# Altium PCB ESP32 PCB V1.PcbDoc (part 4 of 4)
Units mil, origin at the board's own origin, x right, y up, seen from the top; angles counter-clockwise.
Board outline 2700 x 1000 mil, 4 copper layers (L1, L2, L3, L4), stack 61.581 mil thick; 64 components, 73 nets, 299 pads, 162 vias.
Unrouted connection lines stored in the file: 1.
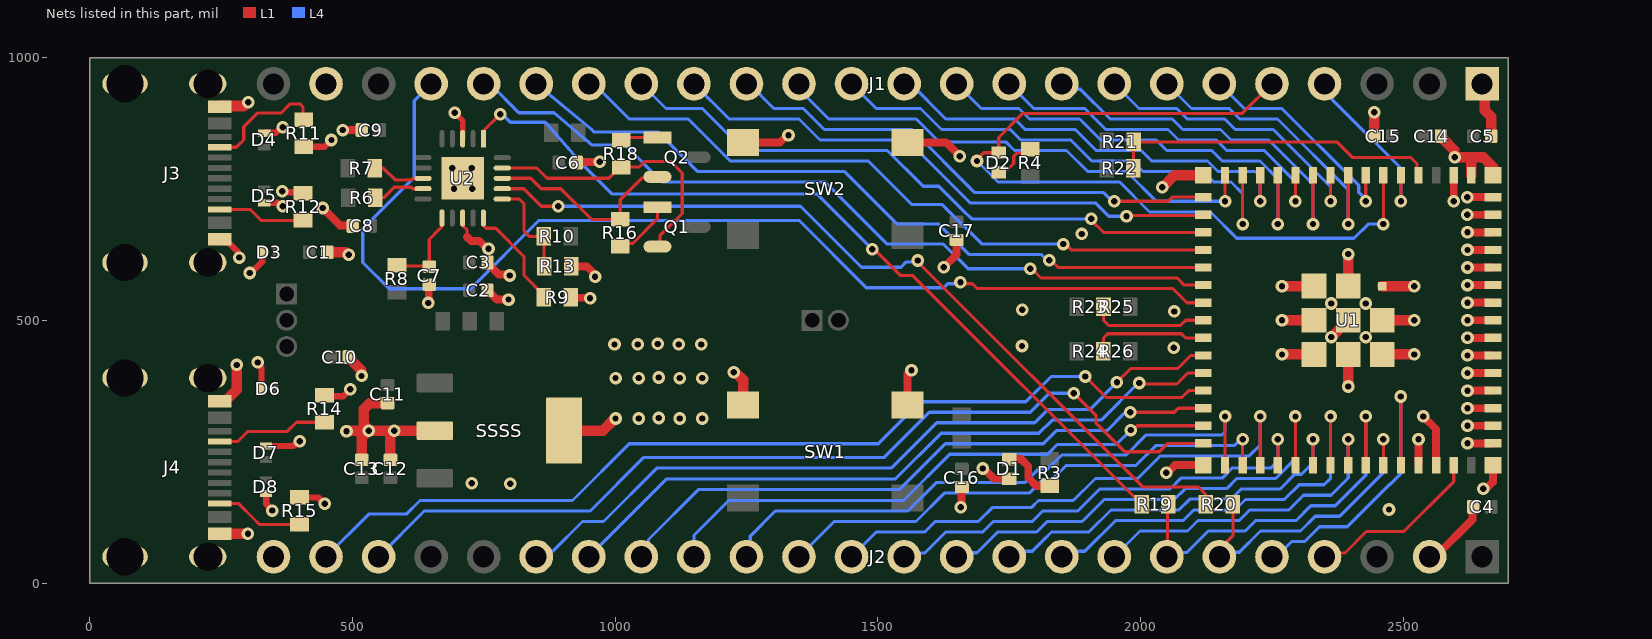
[diagram p4: the nets of this part, all layers, seen from the top]

## Via types
v1: diameter 24, hole 12, L1 to L4, tented both sides, 162 vias

## Nets (pads, with @x,y where several pads share a name; then routed paths per layer and width w, separated by ;. In a path a pad name is that pad's centre, name@x,y a point inside that pad or via, vN(x,y) a via of type N, cw(c..) or ccw(c..) an arc to the next point about the centre after c; other vN are vias at no path point) (continued)
DTR_FTDI: Q2.2 R16.1 U2.18 | length 371.4
  L1 w6: U2.18@796.94,770.23 809.27,770.23 839.77,770.23 859.69,750.31 896.87,750.32 955.14,692.04 R16.1@1010,692.04 1010,729.5 1050.94,770.44 1078.18,770.44 Q2.2@1080.58,772.83
ESP_USB_N: R23.2 R25.2 U1.23 | length 223.8
  L1 w6.03: R23.2@1929.66,525.64 1929.66,499.51 1938.89,490.28 2075.93,490.28 2085.65,500 U1.23@2119.45,500
ESP_USB_P: R24.2 R26.2 U1.24 | length 222
  L1 w6.03: R24.2@1929.4,440.94 1929.4,466.28 1937.53,474.41 2077.57,474.41 2085.44,466.54 U1.24@2119.45,466.54
FTDI_RESET: C7.1 R8.2 U2.11 | length 164.7
  L1 w6: R8.2@585,604.33 586.06,603.27 645.28,603.27 C7.1@646.34,602.2 646.34,653.77 664.46,671.89 669.95,677.38 669.95,693.91 U2.11@670.63,694.59
FTDI_USB_N: R6.2 U2.9 | length 100.6
  L1 w6.03: R6.2@543.34,733.44 560.13,733.44 579.84,753.14 612.21,753.14 615.04,750.32 U2.9@634.59,750.32
FTDI_USB_P: R7.2 U2.8 | length 102.5
  L1 w6.03: R7.2@542.43,789.34 559.23,789.34 581.4,767.17 612.21,767.17 615.04,770 U2.8@634.59,770
GND: C1.1 C2.1 C3.2 C4.1 C5.1 C6.2 C7.2 C8.2 C9.1 C10.1 C11.1 C12.1 C13.1 C14.1 C15.1 C16.1 C17.1 D1.1 D3.1 D4.1 D5.1 D6.1 D7.1 D8.1 J1.1 J1.23 J2.2 J2.24 J3.A1B12 J3.B1A12 J3.S1 J3.S2 J3.S3 J3.S4 J4.A1B12 J4.B1A12 J4.S1 J4.S2 J4.S3 J4.S4 R9.2 R11.1 R12.1 R13.1 R14.1 R15.1 SSSS.2 SSSS.4 SW1.3 SW1.4 SW2.3 SW2.4 U1.1 U1.2 U1.42 U1.43 U1.46 U1.47 U1.48 U1.49 U1.50 U1.51 U1.52 U1.53 U1.54 U1.55 U1.56 U1.57 U1.58 U1.59 U1.60 U1.61 U1.62 U1.63 U1.64 U1.65 U1.66 U1.67 U1.68 U1.69 U1.70 U1.71 U1.72 U1.73 U2.3 U2.13 U2.21 | length 4536.4
  L1 w6: U2.13@710,694.59 710,680.21 718.32,671.89 718.32,658.61
  L1 w10.01: v1(695.09,895) 710,880.09 U2.3@710,845.41
  L1 w12: J3.B1A12@247.64,653.94 253.45,648.13 264.28,648.13 282.38,630.03 282.38,621.59 v1(284.67,619.29) ; v1(305,590) 307.13,590 328.52,611.39 328.52,628.64 D3.1@329.41,629.53 ; v1(320.31,419.76) 320.31,416.52 327.2,409.63 D6.1@327.2,370 ; D5.1@332.5,723.82 357.49,723.82 364.18,717.13 v1(367.43,717.13) ; D4.1@332.61,855.89 333.5,856.78 354.07,856.78 364.61,867.32 v1(367.86,867.32) ; D8.1@335.75,170.48 335.75,169.96 336.12,169.59 336.12,150.47 347.56,139.03 v1(347.56,137.9) ; D7.1@335.77,260.82 388.06,260.82 396.75,269.51 v1(400,269.51) ; v1(366.76,745.63) 369.03,743.35 404.16,743.35 R12.1@406.2,741.31 ; R15.1@399.56,162.77 434.89,162.77 446.85,150.8 v1(447.46,150.8) ; R11.1@407.57,830.3 447.25,830.3 460.04,843.1 v1(460.28,843.1) ; R14.1@442.61,355.59 482.63,355.59 v1(495.98,368.94)
  L1 w15: v1(443.64,713.66) 476.83,680.47 498.63,680.47 C8.2@499.65,679.45 ; v1(482,861.94) C9.1@509.25,861.94 ; v1(644.41,533) 645.37,533.97 645.37,566.83 C7.2@646.34,567.8 ; 718.32,658.61 725.79,651.15 741.51,651.15 756.64,636.02 v1(759.08,636.02) ; C3.2@757.2,610 761.52,605.69 761.52,604.31 778.93,586.9 798.01,586.9 v1(799.73,585.18) ; C2.1@757.26,557.04 757.26,555.66 761.58,551.35 762.95,551.35 774.93,539.37 v1(797.17,539.37) ; R9.2@915.59,543.85 916.69,542.75 951.38,542.75 v1(952.48,541.65) ; R13.1@916.37,602.7 R13.1@916.37,602.7 946.32,602.66 960.29,588.7 960.29,584.71 v1(962.01,582.99) ; C6.2@927.2,800 928.07,800.87 970.07,800.87 v1(970.94,801.74) ; SW2.4@1243.5,838.58 1314.15,838.58 1327.56,852 v1(1330,852) ; SW1.3@1556.5,338.58 1556.5,397.5 v1(1564,405) ; SW2.3@1556.5,838.58 1629.89,838.58 v1(1656.1,812.37) ; v1(1625.65,600.84) 1650,625.19 C17.1@1650,652.8 ; v1(1657.73,144) 1658.87,145.13 1658.87,181.66 C16.1@1660,182.8 ; v1(1699.72,218) 1701.64,218 1721.14,198.5 D1.1@1750,198.5 ; v1(2048.77,209.89) 2051.2,209.89 2065.72,224.41 U1.64@2119.45,224.41 ; U1.42@2528.9,224.41 2528.9,276.06 v1@2530.62,277.78 ; v1(2538,317) 2538,316.93 2562.36,292.57 U1.43@2562.36,224.41 ; J2.2@2550,50 2560.62,50 2631.66,121.04 2631.66,139.31 2632.8,140.45 C4.1@2632.8,145 ; v1(2595.83,726.38) U1.2@2595.83,775.59 ; v1(2621.42,700.79) U1.59@2670.63,700.79 ; v1(2621.42,734.25) U1.60@2670.63,734.25 ; v1(2622,265.75) U1.46@2670.63,265.75 ; v1(2622,299.21) U1.47@2670.63,299.21 ; v1(2622,332.68) U1.48@2670.63,332.68 ; v1(2622,366.14) U1.49@2670.63,366.14 ; v1(2622,399.61) U1.50@2670.63,399.61 ; v1(2622,433.07) U1.51@2670.63,433.07 ; v1(2622,466.54) U1.52@2670.63,466.54 ; v1(2622,500) U1.53@2670.63,500 ; v1(2622,533.46) U1.54@2670.63,533.46 ; v1(2622,566.93) U1.55@2670.63,566.93 ; v1(2622,600.39) U1.56@2670.63,600.39 ; v1(2622,633.86) U1.57@2670.63,633.86 ; v1(2622,667.32) U1.58@2670.63,667.32 ; v1(2652.08,179.39) 2653.81,181.11 2659.09,181.11 2670.31,192.33 2670.31,224.09 U1.65@2670.63,224.41
  L1 w20: J3.S1@225,950 227.37,950 J3.S1@236.32,941.05 ; J4.B1A12@247.64,94.09 259.96,94.09 260.28,93.78 v1(301.41,93.78) ; J4.A1B12@247.64,346.06 258.46,346.06 280,367.6 v1@280,413.92 ; J3.A1B12@247.64,905.91 249.45,907.72 293.63,907.72 300.92,915 v1(302,915) ; C1.1@452.42,629.53 487,629.53 491.92,624.61 v1(493,624.61) ; v1(489,289) 489.5,289.5 530.69,289.5 v1(531.19,290) ; C10.1@493.43,430 493.43,428.62 516.92,405.13 516.92,394.85 v1(517.69,394.09) ; C13.1@518,234.37 518,276.18 531.19,289.37 v1(531.19,290) ; C11.1@567.28,342.37 533.15,342.37 521.44,330.65 521.44,300.83 531.19,291.08 v1(531.19,290) ; C12.1@572.63,234.37 572.63,281.94 579.61,288.92 v1(579.61,290) SSSS.2@656.97,290 ; v1@572.63,290 v1(531.19,290) ; SSSS.4@905,280 905,288.03 SSSS.4@903.03,290 976.92,290 999.92,313 v1(1001,313) ; v1(1226,401) 1226.77,400.23 1229.68,400.23 1243.5,386.41 SW1.4@1243.5,338.58 ; v1(2041,753.38) 2042.08,753.38 2064.29,775.59 U1.63@2119.45,775.59 ; v1(2269.06,435.04) U1.73@2330.08,435.04 ; v1(2269.06,500) U1.72@2330.08,500 ; v1(2269.06,564.96) U1.71@2330.08,564.96 ; v1(2363,468) U1.61@2395.04,500 ; v1(2395.04,374.02) U1.70@2395.04,435.04 ; U1.69@2395.04,564.96 v1(2395.04,625.98) ; C15.1@2444.76,850.24 v1(2444.76,896) ; U1.68@2460,435.04 v1(2521.02,435.04) ; U1.67@2460,500 v1(2521.02,500) ; U1.66@2460,564.96 v1(2521.02,564.96) ; C14.1@2571.69,850.24 2573.5,848.43 2573.5,847.05 2597.23,823.32 2597.23,810.32 2596.92,810 2624.98,810 ; U1.1@2629.29,775.59 2629.29,805.69 2624.98,810 ; J1.1@2650,950 2655.1,944.9 2655.1,899.72 2667.2,887.61 C5.1@2667.2,850.24 ; U1.62@2670.63,775.59 2670.63,791.34 2651.97,810 2624.98,810
  other v1: 2472.63,140 800.7,189.03 727.37,190 2528.9,273.62 1045,313 1123,313 1166,312.99 1083,314 1001,389.99 1045,390 1123,390 1166,389.99 1083,391 280,415 2063.29,447.85 1774.27,451 999,453.99 1043,454 1121,454 1164,453.99 1081,455 2428.5,468 2064.08,516.84 1775.07,520 2363,532 2428.5,532 1888.31,664.27 693.69,750.32 727.96,750.32 690.31,789.76 727.37,789.76 2598,810
GPIO0: R21.2 R22.2 U1.4 | length 630.2
  L1 w6: R22.2@1986.41,789.06 1986.67,789.32 1986.67,839.1 R21.2@1986.94,839.37 2373.54,839.37 2402.91,810 2513.69,810 2526.08,797.61 2526.08,778.41 U1.4@2528.9,775.59
GPIO1: J1.4 U1.5 | length 333.1
  L1 w6: v1(2495.43,726.38) U1.5@2495.43,775.59
  L4 w6: J1.4@2350,950 2350,935.39 2365.48,919.91 2365.48,919.01 2495.43,789.06 v1(2495.43,726.38)
GPIO2: D2.1 J1.5 U1.6 | length 1578.9
  L1 w6: v1(1688.78,802.98) 1688.78,806.26 1701.22,818.7 D2.1@1730,818.7 1730,847.72 1775.98,893.69 2193.69,893.69 J1.5@2250,950 ; v1(2461.97,683) U1.6@2461.97,775.59
  L4 w6: v1(1688.78,802.98) 1728.76,763 1960.01,763 2016.94,706.07 2133,706.07 2183.07,656 2406.22,656 2433.22,683 v1(2461.97,683)
GPIO3: J1.6 U1.7 | length 430.2
  L1 w6: v1(2428.5,726.38) U1.7@2428.5,775.59
  L4 w6: J1.6@2150,950 2197,903 2268.72,903 2415.04,756.68 2415.04,743.63 2428.5,730.17 v1(2428.5,726.38)
GPIO4: J1.7 U1.8 | length 586.5
  L1 w6: v1(2395.04,683) U1.8@2395.04,775.59
  L4 w6: J1.7@2050,950 2097,903 2168.72,903 2188.72,883 2260.43,883 2395.04,748.39 v1(2395.04,683)
GPIO5: J1.8 U1.9 | length 569.3
  L1 w6: v1(2361.57,726.38) U1.9@2361.57,775.59
  L4 w6: J1.8@1950,950 1997,903 2068.72,903 2088.72,883 2160.43,883 2180.43,863 2252.15,863 2361.57,753.57 v1(2361.57,726.38)
GPIO6: J1.9 U1.10 | length 725.7
  L1 w6: v1(2328.11,683) U1.10@2328.11,775.59
  L4 w6: J1.9@1850,950 1860.33,939.67 1885.51,939.67 1942.17,883 2060.43,883 2080.43,863 2152.15,863 2172.15,843 2243.86,843 2328.11,758.75 v1(2328.11,683)
GPIO7: J1.10 U1.11 | length 708.5
  L1 w6: v1(2294.65,726.38) U1.11@2294.65,775.59
  L4 w6: J1.10@1750,950 1797,903 1868.72,903 1893.89,903 1933.89,863 2052.15,863 2072.15,843 2143.86,843 2163.86,823 2235.58,823 2294.65,763.93 v1(2294.65,726.38)
GPIO8: J1.11 U1.12 | length 864.8
  L1 w6: v1(2261.18,683) U1.12@2261.18,775.59
  L4 w6: J1.11@1650,950 1697,903 1768.72,903 1788.72,883 1860.43,883 1884,883 1924,843 2030,843 2050,823 2135.58,823 2155.58,803 2227.29,803 2261.18,769.11 v1(2261.18,683)
GPIO9: J1.12 U1.13 | length 847
  L1 w6: v1(2227.72,726.38) U1.13@2227.72,775.59
  L4 w6: J1.12@1550,950 1562.47,950 1629.47,883 1760.43,883 1780.43,863 1852.15,863 1875.72,863 1915.72,823 2001.07,823 2021.07,803 2127.29,803 2147.29,783 2218,783 2227.72,773.28 v1(2227.72,726.38)
GPIO10: J1.13 U1.14 | length 981.4
  L1 w6: v1(2194.25,683) U1.14@2194.25,775.59
  L4 w6: J1.13@1450,950 1497,903 1581.18,903 1621.18,863 1752.15,863 1772.15,843 1867.43,843 1907.43,803 1984.51,803 2004.51,783 2119.01,783 2139.01,763 2172.15,763 2194.25,740.9 v1(2194.25,683)
GPIO11: J1.14 U1.15 | length 958.7
  L1 w6: v1(2160.79,726.38) U1.15@2160.79,775.59
  L4 w6: J1.14@1350,950 1350,939.57 1406.57,883 1572.9,883 1616.53,839.37 1743.63,839.37 1760,823 1859.15,823 1899.15,783 1973.19,783 2029.82,726.38 v1(2160.79,726.38)
GPIO12: J1.15 U1.16 | length 965.3
  L1 w6: v1(1950,726.38) 2052.18,726.38 2060.06,734.25 U1.16@2119.45,734.25
  L4 w6: J1.15@1250,950 1255.28,950 1302.28,903 1358.28,903 1398.28,863 1564.62,863 1684.62,743 1929.59,743 1946.21,726.38 v1(1950,726.38)
GPIO13: J1.16 U1.17 | length 1074.9
  L1 w6: v1(1973.19,698.07) 1974.55,699.43 2118.09,699.43 U1.17@2119.45,700.79
  L4 w6: J1.16@1150,950 1217,883 1350,883 1390,843 1556.33,843 1676.33,723 1914.74,723 1939.66,698.07 v1(1973.19,698.07)
GPIO14: J1.17 U1.18 | length 1188.6
  L1 w6: v1(1906.17,693.38) 1906.17,690.56 1929.41,667.32 U1.18@2119.45,667.32
  L4 w6: J1.17@1050,950 1097,903 1165.95,903 1245.95,823 1518,823 1586.09,754.91 1616.14,754.91 1668.05,703 1668.85,703 1678.93,692.91 1905.7,692.91 v1(1906.17,693.38)
GPIO15: J1.18 U1.19 | length 1300.4
  L1 w6: v1(1853,645) 1856.79,645 1867.93,633.86 U1.19@2119.45,633.86
  L4 w6: J1.18@950,950 959.82,950 1026.82,883 1139.09,883 1219.11,802.98 1482,802.98 1564.98,720 1622.76,720 1659.76,683 1660.56,683 1698.56,645 v1(1853,645)
GPIO16: J1.19 U1.20 | length 1409.5
  L1 w6: v1(1826.09,614.09) 1829.88,614.09 1843.58,600.39 U1.20@2119.45,600.39
  L4 w6: J1.19@850,950 955.86,862.61 956.57,861.96 960.53,858 1082.54,858 1157.63,782.91 1436.8,782.91 1536.71,683 1616.14,683 1674.14,625 1811.4,625 1822.3,614.09 v1(1826.09,614.09)
GPIO17: J1.20 U1.21 | length 1525.1
  L1 w6: v1(1790,598) 1792.97,598 1810.58,580.39 2069.79,580.39 2083.25,566.93 U1.21@2119.45,566.93
  L4 w6: J1.20@750,950 761.96,950 816.96,895 883.6,895 956.71,833.2 1019.78,833.2 1090.07,762.91 1400,762.91 1517.91,645 1625,645 1672,598 v1(1790,598)
GPIO18: J1.21 U1.22 | length 2141.1
  L1 w6: v1(1657.2,572.2) 1659.88,569.52 1680.07,569.52 1689.2,560.39 2061.5,560.39 2088.43,533.46 U1.22@2119.45,533.46
  L4 w6: J1.21@650,950 618,918 618,870 618,771.81 520,673.81 520,610 570,560 725.35,560 855.35,690 1350,690 1478,562 1625.2,562 1632.72,569.52 1654.52,569.52 v1(1657.2,572.2)
GPIO21: J2.19 U1.25 | length 1428.1
  L1 w6: v1(1955,382) 1981.23,408.23 2070.44,408.23 2094.95,432.73 2119.11,432.73 U1.25@2119.45,433.07
  L4 w6: J2.19@850,50 860.33,60.33 881.33,60.33 938,117 978,117 1080.14,219.14 1526.23,219.14 1612.1,305 1798.27,305 1823.31,330.03 1903.03,330.03 v1(1955,382)
GPIO26: J2.18 U1.26 | length 1315.8
  L1 w6: v1(1997.61,380.55) 1999.42,378.75 2069.24,378.75 2074.16,383.66 2090.11,399.61 U1.26@2119.45,399.61
  L4 w6: J2.18@950,50 1098.14,198.14 1533.52,198.14 1620.38,285 1806.56,285 1831.59,310.03 1925.03,310.03 1995.55,380.55 v1(1997.61,380.55)
GPIO33: J2.17 U1.28 | length 1197.7
  L1 w6: v1(1980.35,325) 2064.18,325 2071.86,332.68 U1.28@2119.45,332.68
  L4 w6: J2.17@1050,50 1050,64.61 1063.73,78.35 1063.73,82.73 1159.14,178.14 1541.81,178.14 1628.67,265 1814.84,265 1839.88,290.03 1936.02,290.03 1968.31,322.32 1977.67,322.32 v1(1980.35,325)
GPIO34: J2.16 U1.29 | length 1096.7
  L1 w6: v1(1981.33,291.02) 1985.12,291.02 1993.32,299.21 U1.29@2119.45,299.21
  L4 w6: J2.16@1150,50 1150.14,50.14 1150.14,91.14 1216,157 1548.95,157 1636.95,245 1823.12,245 1841.66,263.54 1953.52,263.54 1981,291.02 v1(1981.33,291.02)
GPIO35: J2.15 U1.31 | length 1149.8
  L1 w6: U1.31@2160.79,224.41 v1(2160.79,317)
  L4 w6: J2.15@1250,50 1257.23,57.23 1257.23,89.23 1305,137 1557.23,137 1611.23,191 1779.72,191 1805.98,217.27 1823.68,217.27 1849.94,243.54 1972.63,243.54 2011.09,282 2154.93,282 2160.79,287.86 v1(2160.79,317)
GPIO36: J2.14 U1.32 | length 986.1
  L1 w6: U1.32@2194.25,224.41 v1(2194.25,273.62)
  L4 w6: J2.14@1350,50 1417,117 1572.63,117 1626.63,171 1788,171 1814.27,197.27 1831.96,197.27 1858.23,223.54 1991.09,223.54 2029.56,262 2178.84,262 2190.46,273.62 v1(2194.25,273.62)
GPIO37: J2.13 U1.33 | length 1012.7
  L1 w6: U1.33@2227.72,224.41 v1(2227.72,317)
  L4 w6: J2.13@1450,50 1497,97 1589.23,97 1609.23,117 1691.43,117 1718.43,144 1792.68,144 1805.68,157 1872.15,157 1914.15,199 1994.84,199 2037.84,242 2207,242 2227.72,262.72 v1(2227.72,317)
GPIO38: J2.12 U1.34 | length 877.7
  L1 w6: U1.34@2261.18,224.41 v1(2261.18,273.62)
  L4 w6: J2.12@1550,50 1557.23,57.23 1589.23,57.23 1629,97 1699.72,97 1719.72,117 1793.96,117 1813.96,137 1880.43,137 1922.43,179 2056.06,179 2076.73,199.67 2155.39,199.67 2174.71,219 2248.61,219 2261.18,231.57 v1(2261.18,273.62)
GPIO39: J2.11 U1.35 | length 894.8
  L1 w6: U1.35@2294.65,224.41 v1(2294.65,317)
  L4 w6: J2.11@1650,50 1657.73,57.73 1688.73,57.73 1728,97 1802.25,97 1822.25,117 1888.72,117 1930.72,159 2064.34,159 2085.02,179.67 2163.67,179.67 2183,199 2256.89,199 2294.65,236.75 v1(2294.65,317)
GPIO40: J2.10 U1.36 | length 746.2
  L1 w6: U1.36@2328.11,224.41 v1(2328.11,273.62)
  L4 w6: J2.10@1750,50 1760.33,60.33 1793.86,60.33 1816.77,83.23 1830.53,97 1850,97 1901.72,97 1943.72,139 2072.63,139 2093.3,159.67 2171.96,159.67 2191.28,179 2265.43,179 2293.43,207 2306.25,207 2328.11,228.86 v1(2328.11,273.62)
GPIO41: J2.9 U1.37 | length 783.5
  L1 w6: U1.37@2361.57,224.41 v1(2361.57,317)
  L4 w6: J2.9@1850,50 1860.33,60.33 1893.86,60.33 1952.53,119 2080.91,119 2100.91,139 2179.57,139 2199.57,159 2273.72,159 2301.72,187 2349,187 2361.57,199.57 v1(2361.57,317)
GPIO42: J2.8 U1.38 | length 630.1
  L1 w6: U1.38@2395.04,224.41 v1(2395.04,273.62)
  L4 w6: J2.8@1950,50 1999,99 2089.2,99 2109.2,119 2187.85,119 2207.85,139 2282,139 2310,167 2362.26,167 2395.04,199.78 v1(2395.04,273.62)
GPIO45: J2.5 U1.41 | length 588.2
  L1 w6: v1(2495,355) 2495.22,354.78 2495.22,224.63 U1.41@2495.43,224.41
  L4 w6: J2.5@2250,50 2258.47,50 2287.47,79 2312.53,79 2340.53,107 2392.97,107 2473.97,188 2475,188 2495,208 v1(2495,355)
GPIO46: J2.4 U1.44 | length 336.5
  L1 w6: J2.4@2350,50 2357.23,57.23 2388.96,57.23 2429.73,98 2500.91,98 2595.83,192.92 U1.44@2595.83,224.41
GPIO47: J2.23 U1.27 | length 1833.4
  L1 w6: v1(1895,393) 1934.89,353.11 2078.54,353.11 2091.57,366.14 U1.27@2119.45,366.14
  L4 w6: J2.23@450,50 531.07,131.07 602.79,131.07 628.72,157 919,157 1027,265 1500.71,265 1580.71,345 1781.7,345 1829.7,393 v1(1895,393)
GPIO48: J2.22 U1.30 | length 1759.3
  L1 w6: v1(1872.63,361.02) 1915.39,318.25 1915.39,304.1 1969.81,249.69 2035.86,249.69 2051.92,265.75 U1.30@2119.45,265.75
  L4 w6: J2.22@550,50 637,137 952.63,137 1054.77,239.14 1512.23,239.14 1598.1,325 1789.99,325 1826,361.02 v1(1872.63,361.02)
NetD1_2: D1.2 R3.1 | length 111.4
  L1 w15: D1.2@1750,235.91 1772.63,235.91 1786.31,222.22 1786.31,200.38 1801.97,184.72 R3.1@1827.37,184.72
NetD2_2: D2.2 R4.1 | length 86.5
  L1 w6: D2.2@1730,781.3 1736.81,788.11 1748.58,788.11 1758.78,798.31 1758.78,812.24 1764.64,818.09 1782.5,818.09 R4.1@1790,825.59
NetJ3_A5: J3.A5 R11.2 | length 234.8
  L1 w6: J3.A5@247.64,829.13 279.35,829.13 285,834.78 293.31,843.1 293.31,868.13 319.28,894.09 364.35,894.09 382,911.74 400.34,911.74 406.2,905.89 406.2,882.86 R11.2@407.57,881.49
NetJ3_B5: J3.B5 R12.2 | length 167.2
  L1 w6: J3.B5@247.64,711.02 285,711.02 305.38,711.02 326.27,690.13 R12.2@406.2,690.13
NetJ4_A5: J4.A5 R14.2 | length 214.7
  L1 w6: J4.A5@247.64,269.29 282.14,269.29 301.41,288.57 376.53,288.57 393.79,305.83 R14.2@447.21,305.83
NetJ4_B5: J4.B5 R15.2 | length 150.1
  L1 w6: J4.B5@264.28,151.09 282.14,151.09 ; 283.7,151.09 313.01,121.78 323.2,111.59 R15.2@399.56,111.59
NetQ1_1: Q1.1 R16.2 | length 102.9
  L1 w6: R16.2@1010,640.86 1014.93,645.79 1033.2,645.79 1080.58,693.17 1080.58,703.86
NetQ2_1: Q2.1 R18.2 | length 71
  L1 w6: R18.2@1011.54,842.81 1016.37,847.64 Q2.1@1080.58,847.64
NetR9_1: R9.1 U2.15 | length 208.6
  L1 w6: U2.15@749.37,694.59 749.37,680.86 755.23,675 772.66,675 826.73,620.93 826.73,585.47 864.41,547.79 R9.1@864.41,543.85
RTS_FTDI: Q1.2 R18.1 U2.19 | length 536
  L1 w6: U2.19@785.68,789.41 809.27,789.41 851.39,789.41 870.49,770.32 988.19,770.32 R18.1@1013.78,795.91 ; R18.1@1011.54,791.63 1046.15,791.63 1056.8,802.27 1105.91,802.27 1127.86,780.32 1127.86,703.22 1085.37,660.72 1085.37,645.11 Q1.2@1080.58,640.32
RXD_FTDI: R19.2 U2.1 | length 1593
  L1 w6: U2.1@749.37,845.41 749.37,859.99 751.33,861.94 v1(781.58,892.2) ; v1(1489.49,635.16) 1493.28,635.16 1543.44,585 1566.78,585 1989.07,162.72 1993,162.72 2001.78,153.94 R19.2@2001.78,150
  L4 w6: v1(781.58,892.2) 785.37,892.2 800.74,876.83 866.94,876.83 868.7,875.07 868.84,874.93 868.96,874.79 935.28,799.21 935.42,799.07 994.49,740 1384.65,740 1469.69,654.96 v1(1489.49,635.16)
TXD_FTDI: R20.2 U2.17 | length 1610.3
  L1 w6: U2.17@785.41,750.32 809.27,750.32 826.16,750.32 859.47,717 v1(892,717) ; v1(1576.14,613.83) 1576.14,610.95 2004.2,182.89 2109.23,182.89 2124.41,167.72 R20.2@2124.41,150
  L4 w6: v1(892,717) 1352.91,717 1468.91,601 1544.14,601 1554.29,611.15 1573.46,611.15 v1(1576.14,613.83)
U0RXD: J2.6 R20.1 U1.40 | length 601.6
  L1 w6: J2.6@2150,50 2150,64.61 2175.59,90.2 R20.1@2175.59,150 ; U1.40@2461.97,224.41 v1(2461.97,273.62)
  L4 w6: J2.6@2150,50 2158.62,58.62 2187.85,58.62 2228.23,99 2304.25,99 2332.25,127 2378.83,127 2461.97,210.14 v1(2461.97,273.62)
U0TXD: J2.7 R19.1 U1.39 | length 748.5
  L1 w6: J2.7@2050,50 2051.48,51.48 2051.48,148.52 R19.1@2052.96,150 ; U1.39@2428.5,224.41 v1(2428.5,317)
  L4 w6: J2.7@2050,50 2058.23,58.23 2088.23,58.23 2129,99 2199,99 2219,119 2295.96,119 2323.96,147 2370.54,147 2428.5,204.96 v1(2428.5,317)
VBUS_SENSE: R10.1 R13.2 U2.16 | length 196.5
  L1 w6: U2.16@785.41,730.63 809.27,730.63 818.13,730.63 826.73,722.03 826.73,669.74 836.85,659.61 864.8,659.61 864.8,603.09 R13.2@865.18,602.7
pads on no net: J1.24 J3.A8 J3.B8 J4.A8 J4.B8 U2.2 U2.4 U2.5 U2.6 U2.7 U2.14

## Polygon pours and split planes (outlines as drawn)
+3.3V on L1 "+3.3V_L01_P000" (solid, pour order 0): 2467.15,875.78 2467.15,834.73 2467.03,834.61 2467.15,834.49 2549.82,834.49 2549.82,893.18 2533,910 2490.12,910
+3V3_FTDI on L1 "+3V3_FTDI_L01_P004" (solid, pour order 4): 896.5,877.71 897.84,876.37 897.84,847.07 902.9,842.02 902.9,815.25 907.07,811.08 907.07,785.8 882.82,785.8 877.62,791 873.35,791.06 868.8,791 847.09,812.72 834.04,812.72 831.81,814.95 831.66,814.8 811.44,814.8 811.44,854.78 834.37,877.71
+3V3_FTDI on L1 "+3V3_FTDI_L01_P005" (solid, pour order 5): 567.02,571.6 606.15,571.6 606.15,537.11 605.65,536.61 605.53,536.74 565.77,536.74 565.77,543.38 565.14,544.01 547.71,544.01 522.88,568.84 522.88,666.66 521.12,668.42 521.12,693.88 546.96,693.88 547.33,694.25 550.34,691.24 560.84,691.24 605,735.4 611.71,735.4 611.71,730.85 611.71,718.84 611.71,703.91 611.71,694.25 611.71,663.48 618.17,653.76 618.17,633.59 552.51,633.59 550.34,605.11 550.34,577.29 557.05,566.07 561.56,566.07 567.11,567.11 566.09,571.61 567.11,571.61
+3V3_REG on L1 "+3V3_REG_L01_P007" (solid, pour order 7): 692.23,220.59 624.25,220.59 621.41,217.75 621.41,211.83 587.85,211.83 587.6,211.58 586.12,213.06 561.36,213.06 559.6,211.3 531.66,211.3 529.66,213.3 517.69,214.71 504.56,213.3 502.73,207.23 502.73,201.25 498.47,177.84 493.49,173.75 478.01,173.75 478.01,165.92 475.63,163.55 475.63,147.26 485.01,137.88 575.22,137.88 593.57,156.23 593.57,174.58 689.03,174.58 697.24,182.78 697.24,220.55 692.23,220.55 692.18,220.6
+5V on L1 "+5V_L01_P008" (solid, pour order 8): 693.06,401.63 620.46,401.63 620.46,387.8 619.2,386.54 580.86,386.54 580.86,431.61 498.32,514.15 391.96,514.15 383.16,522.95 363.99,522.95 363.99,520.75 353.93,510.69 354.25,510.38 354.25,486.49 364.62,476.12 389.45,476.12 399.82,486.49 496.74,486.49 558.54,424.69 558.54,394.09 550.68,386.23 550.68,363.92 551,363.92 554.14,360.77 581.8,360.77 581.8,361.4 589.34,368.94 617.32,368.94 617.32,364.86 622.97,359.2 692.75,359.2 697.15,363.6 695.69,365.06 695.69,401.65 693.08,401.65
+5V_VBUS1 on L1 "+5V_VBUS1_L01_P009" (solid, pour order 9): 437.72,667.13 437.72,522.95 345.41,522.95 342.2,522.95 341.04,524.12 341.04,665.13 429.82,667.13
+5V_VBUS2 on L1 "+5V_VBUS2_L01_P010" (solid, pour order 10): 340,470 347.36,474.84 473.9,474.84 473.9,389.91 460.16,376.17 424.29,376.17 424.29,334.73 424.57,334.45 424.37,334.25 340,334.25
GND on L1 "GND_L01_P011" (solid, pour order 11): 2227.72,641.73 2548.23,641.73 2548.23,401.96 2538,391.73 2460,391.73 2460,360.69 2439.86,340.55 2227.72,340.55
GND on L1 "GND_L01_P012" (solid, pour order 12): 1197,150 1197,502 997.97,499.25 946.32,453.99 864.41,453.99 780.65,361.36 776.3,357.01 521.44,357.01 490.25,334.73 473.9,300.83 473.9,256.45 490.25,237.98 490.25,217.75 600.53,217.75 617.15,234.37 809.63,234.37 846,198 846,143 849,140 1197,140 1197,150 1196,151
+3.3V on L2 "+3.3V_L02_P015" (solid, remove dead copper, pour order 15): 904.46,992.88 904.46,833.2 1183.93,833.2 1184.28,833.55 1190.1,827.72 1190.1,585.76 1408.19,585.76 1408.97,584.98 1408.97,518.28 1400.07,509.38 1400.07,466.74 1467.74,466.74 1467.74,469.77 1467.74,652.48 1823.92,652.48 1930.24,758.8 2510.37,758.8 2521.02,748.15 2521.02,629 2536.8,613.22 2536.8,344.1 2482.35,289.64 2482.54,289.45 2482.54,245.34 2357.2,120 2310.86,120 2310.86,9.82 2313.63,7.05 2692.7,7.05 2692.7,993.35
GND on L2 "GND_L02_P019" (solid, remove dead copper, pour order 19): 15.03,7.05 7.96,12.59 7.96,993.35 2692.7,993.35 2692.7,7.05 2275.95,6.39 1861.07,12.59
+3V3_REG on L2 "+3V3_REG_L02_P018" (solid, pour order 18): 492,218 493,219 697,219 697,99 691.78,93.78 464.55,93.78 464.55,176.55 472,184 486.98,184 495.98,193 492,196.98 492,219
GND on L3 (split plane): 2699.95,0.05 0.05,0.05 0.05,999.95 2699.95,999.95

## Silkscreen, mask and mechanical layers (free items; w line width, h text height)
Top Overlay:
  lines w10: 749.37,873.27 749.37,900 ; 750,113.27 750,140 ; 1249.2,896.76 1249.42,880.92 ; 1249.49,103.5 1249.48,124.59 ; 1750,113.27 1750,140 ; 1750,873.27 1750,900 ; 2250,113.27 2250,140 ; 2250,873.27 2250,900
  text "J1" at 2306,833.2 h40
  text "USR" at 1711,686 h40
  text "BOOT/USR" at 1246,566 h40
  text "USB1" at 443.64,533 h20
  text "UART" at 55.9,526 h40
  text "REG" at 1206,486 h40
  text "3V3" at 1486,486 h40
  text "+5V" at 429.72,472.65 h40
  text "ESP" at 49.9,446 h40
  text "USB2" at 529.67,418.43 h40
  text "RESET" at 1306,386 h40
  text "POWER" at 1706,286 h40
  text "J2" at 2288,106 h40
Bottom Overlay:
  text "IO8" at 1668.87,879.86 h40 r90
  text "IO1" at 2370.22,879.86 h40 r90
  text "IO11" at 1370,879.46 h40 r90
  text "IO3" at 2168.02,877.91 h40 r90
  text "I02" at 2272.54,877.91 h40 r90
  text "NC" at 367.04,877.37 h40 r90
  text "5V" at 570.14,877.37 h40 r90
  text "IO18" at 670.65,877.37 h40 r90
  text "IO17" at 769.06,877.37 h40 r90
  text "IO12" at 1271.58,877.37 h40 r90
  text "IO6" at 1869.12,876.93 h40 r90
  text "IO5" at 1969.73,876.93 h40 r90
  text "IO4" at 2071.31,876.93 h40 r90
  text "I00" at 2473.76,876.93 h40 r90
  text "IO7" at 1767.53,875.95 h40 r90
  text "GND" at 467.54,875.27 h40 r90
  text "IO15" at 967.97,875.27 h40 r90
  text "3V3" at 2574.37,874.98 h40 r90
  text "GND" at 2674,874 h40 r90
  text "IO16" at 865.38,873.18 h40 r90
  text "IO14" at 1068.48,873.18 h40 r90
  text "IO13" at 1168.99,873.18 h40 r90
  text "IO9" at 1566.82,873.18 h40 r90
  text "IO10" at 1466.9,872.44 h40 r90
  text "-----1-----" at 2674,734 h40 r90
  text "VenomPrince" at 1014,606 h40
  text "LOOK AT YOU - A HACKER ;)" at 2454,392.66 h40
  text "IO35" at 1273.02,296.03 h40 r90
  text "IO47" at 477.38,294.82 h40 r90
  text "IO421" at 875.31,294.94 h40 r90
  text "EN" at 2471.6,294.94 h40 r90
  text "TXD" at 2074.98,292.76 h40 r90
  text "IO39" at 1675.09,291.67 h40 r90
  text "IO34" at 1170.76,291.28 h40 r90
  text "IO36" at 1368.14,291.28 h40 r90
  text "GND" at 375.13,290.06 h40 r90
  text "IO48" at 572.51,290.06 h40 r90
  text "USB+" at 773.05,290.19 h40 r90
  text "IO26" at 970.43,290.19 h40 r90
  text "IO37" at 1475.16,290.09 h40 r90
  text "IO46" at 2369.35,290.19 h40 r90
  text "GND" at 2566.73,290.19 h40 r90
  text "USB-" at 679.52,288.87 h40 r90
  text "IO33" at 1077.44,289 h40 r90
  text "3V3" at 2673.74,289 h40 r90
  text "IO42" at 1972.72,288.01 h40 r90
  text "RXD" at 2170.11,288.01 h40 r90
  text "IO38" at 1572.83,286.92 h40 r90
  text "IO40" at 1770.21,286.92 h40 r90
  text "IO45" at 2277.12,286.82 h40 r90
  text "IO41" at 1877.23,285.73 h40 r90
Board Shape:
  the board outline again, w10

## Text inside footprints (layer, text, board x,y; h text height)
J1: Bottom Overlay "1" at 2646,1026 h40 r270
J2: Bottom Overlay "1" at 2626,-34 h40 r270
J5: Top Overlay "1" at 300,530 h40